# Altium PCB PCB1.PcbDoc
Units mil, origin at the board's own origin, x right, y up, seen from the top; angles counter-clockwise.
Board outline 3225 x 3120 mil, 2 copper layers (Top Layer, Bottom Layer); 2 components, 5 nets, 40 pads, 3 vias.
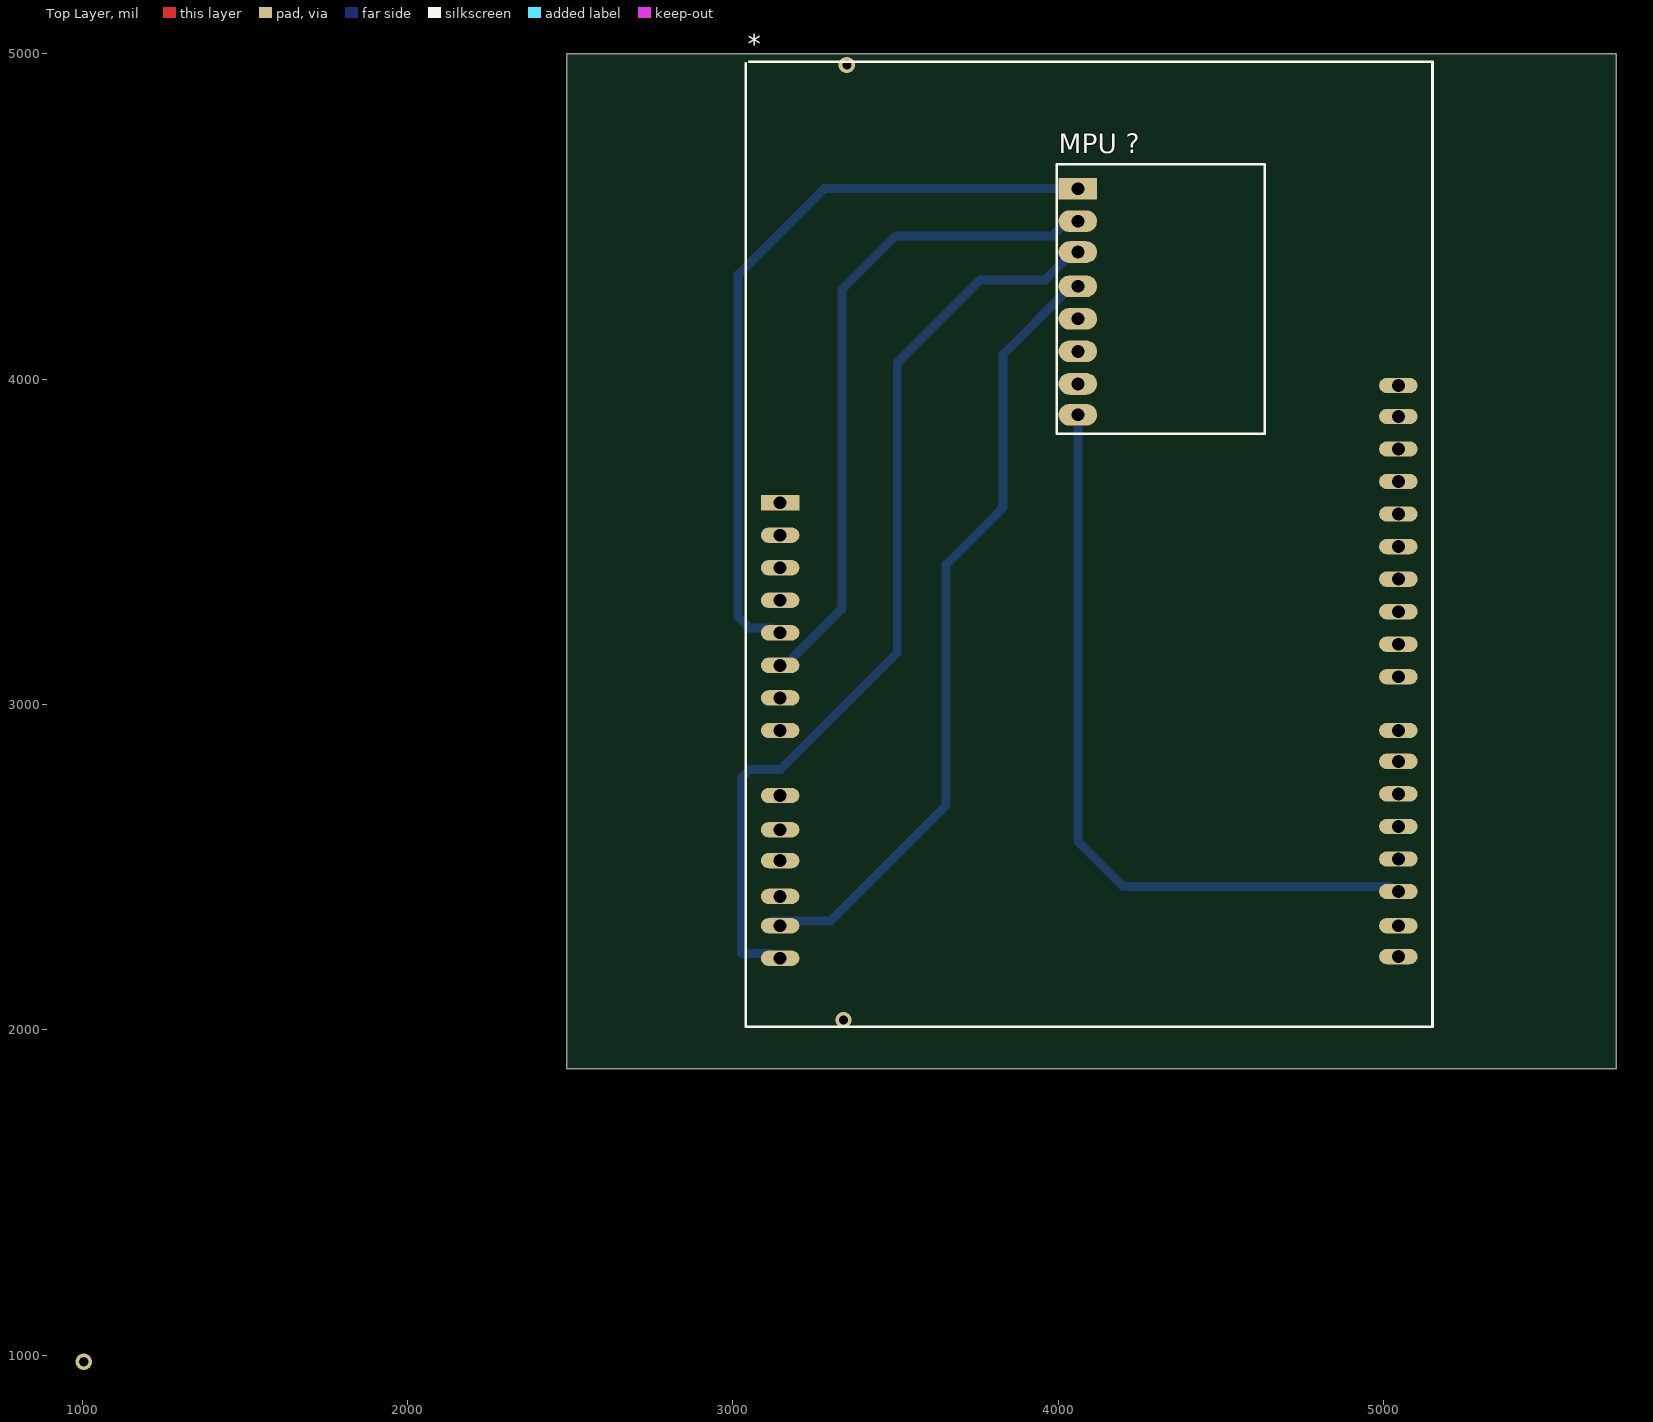
[diagram p0: Top Layer view]
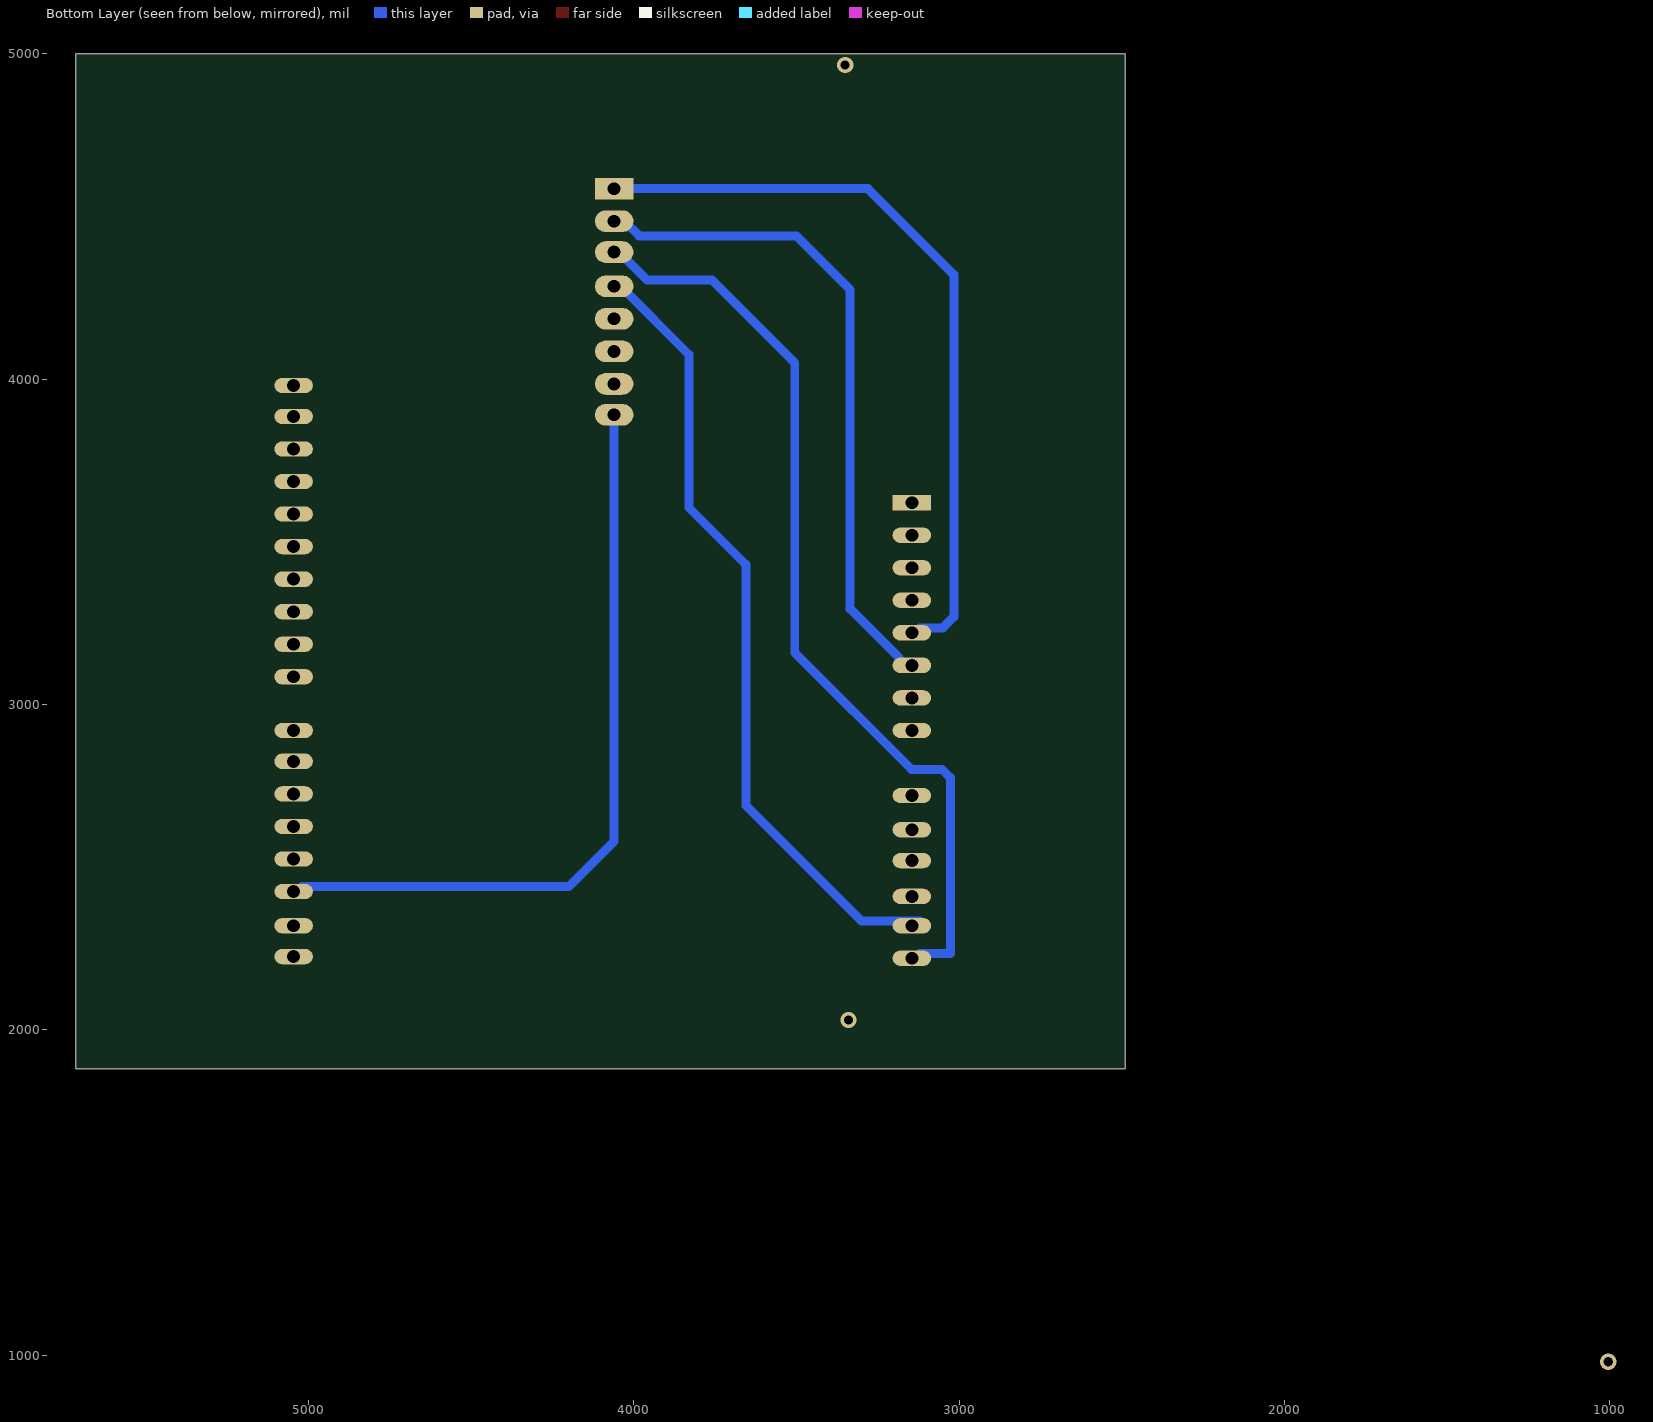
[diagram p1: Bottom Layer view, seen from below]

## Layer stack, top to bottom
Top Solder: solder mask 0.4, Solder Resist, Dk 3.5
Top Layer: signal copper 1.4
Dielectric 1: dielectric 12.6, FR-4, Dk 4.8
Bottom Layer: signal copper 1.4
Bottom Solder: solder mask 0.4, Solder Resist, Dk 3.5

## Board outline
2490,1880 5715,1880 5715,5000 2490,5000

## Design rules (kind name [scope] priority, off if disabled: settings)
Clearance [All] p1: gap=19.68 ignorepadtopadclearanceinfootprint=FALSE
PolygonConnect [All] p1: connectstyle=Direct reliefconductorwidth=10 reliefentries=4 polygonreliefangle="90 Angle" airgapwidth=10
RoutingLayers [All] p1: top layer_v5=FALSE bottom layer_v5=TRUE
RoutingVias [All] p1: holewidth=28 width=50 viastyle="Through Hole" minholewidth=28 minwidth=50 maxholewidth=28 maxwidth=50
SolderMaskExpansion [All] p1: expansion=4 istentingtop=FALSE
Width [All] p1: maxlimit=27.56 minlimit=27.56 preferedwidth=27.56
29 further rules are at their usual default settings.

## Components (designator, comment, footprint, x,y, rotation, side; value= is the part's Value field where it differs from the comment)
* "Arduino uno ?" "ARD LIB" 3470,3580 r0 top
"MPU ?" "MPU6050 ?" "MPU pcb - duplicate" 4060,4570 r0 top

## Footprints (in the part's own frame and the unit in brackets; to place one, negate y for a bottom-side part, rotate by r counter-clockwise, add the part's x,y. Pads: shape width x height; smd on the part's side, far side on the other; paste and mask are expansions set on the pad)
"ARD LIB" [mm]
  rect 3x1.2 hole 1: 1(-8.255,1.016)
  oval 3x1.2 hole 1: 2(-8.255,-1.524) 3(-8.255,-4.064) 4(-8.255,-6.604) 5(-8.255,-9.144) 6(-8.255,-11.684) 7(-8.255,-14.224) 8(-8.255,-16.764) 9(-8.255,-21.844) 10(-8.255,-24.511) 11(-8.255,-26.924) 12(-8.255,-29.718) 13(-8.255,-32.004) 14(-8.255,-34.544) 15(40.005,-32.004) 16(40.005,-34.417) 17(40.005,-29.337) 18(40.005,-26.797) 19(40.005,-24.257) 20(40.005,-21.717) 21(40.005,-19.177) 22(40.005,-16.764) 23(40.005,-12.573) 24(40.005,-10.033) 25(40.005,-7.493) 26(40.005,-4.953) 27(40.005,-2.413) 28(40.005,0.127) 29(40.005,2.667) 30(40.005,5.207) 31(40.005,7.747) 32(40.005,10.16)
  silkscreen extent -10.92,-39.88 42.67,35.43, body extent -10.92,-39.76 42.67,35.45, height 2.75
"MPU pcb - duplicate" [mm]
  rect 3x1.7 hole 1: 1(0,0.381)
  oval 3x1.7 hole 1: 2(0,-2.159) 3(0,-4.572) 4(0,-7.239) 5(0,-9.779) 6(0,-12.319) 7(0,-14.859) 8(0,-17.272)
  silkscreen extent -1.65,-18.75 14.6,2.29, body extent -1.27,-19.19 14.6,1.92, height 14.61

## Part data
*: Parameter 1=ARDUINO
"MPU ?": Parameter 1=MPU6050

## Via types
v1: diameter 50, hole 28, Top Layer to Bottom Layer, 3 vias

## Nets (pads, with @x,y where several pads share a name; then routed paths per layer and width w, separated by ;. In a path a pad name is that pad's centre, name@x,y a point inside that pad or via, vN(x,y) a via of type N, cw(c..) or ccw(c..) an arc to the next point about the centre after c; other vN are vias at no path point)
2: "MPU ?.8" *.17 | length 2328
  Bottom Layer w27.56: 4060,3890 4060,2580 4200,2440 *.17@5020,2440
5V: "MPU ?.1" *.5 | length 2323.4
  Bottom Layer w27.56: *.5@3120,3235 3050,3235 3016,3269 3016,4321 3280,4585 4060,4585
A4: "MPU ?.4" *.13 | length 2456.7
  Bottom Layer w27.56: *.13@3120,2335 3300,2335 3655,2690 3655,3430 3830,3605 3830,4075.24 4039.76,4285 4060,4285
A5: "MPU ?.3" *.14 | length 2856.9
  Bottom Layer w27.56: *.14@3120,2235 3027,2235 3027,2775 3052,2800 3146,2800 3505,3159 3505,4050 3760,4305 3959.76,4305 4044.76,4390 4060,4390
GND: "MPU ?.2" *.6 | length 2063.3
  Bottom Layer w27.56: *.6 3175.11,3120 3184.2,3129.09 3184.2,3143.03 3335,3293.83 3335,4275 3500,4440 3983.58,4440 4028.58,4485 4060,4485
pads on no net: "MPU ?.5" "MPU ?.6" "MPU ?.7" *.1 *.2 *.3 *.4 *.7 *.8 *.9 *.10 *.11 *.12 *.15 *.16 *.18 *.19 *.20 *.21 *.22 *.23 *.24 *.25 *.26 *.27 *.28 *.29 *.30 *.31 *.32
copper on no net:
  other v1: 1005,980 3340,2030 3350,4965

## Dimensions
2475,5030 to 2490,1880 on Top Layer
5680,4980 to 2500,5020 on Top Layer